# EAGLE board 210042174_Hasin_Mahtab_Task_02 (EAGLE 9.7.0)

Size 176.99 x 107.53 mm. Coordinates in mm from the lower left corner, seen from the top.
Outline: 0,0 176.99,0 176.99,107.53 0,107.53 0,0
Copper layers (1*16): Top 0.035mm / dielectric 1.5mm / Bottom 0.035mm
Design rules "default": minimum track width 6mil, minimum drill 0.35mm, track to track 6mil, track to pad 6mil, pad to pad 6mil, via to via 6mil, smd to smd 6mil, copper to edge 40mil, drill to drill 6mil, minimum pad ring 10mil, minimum via ring 8mil, stop-mask expansion 4mil, vias tented up to drill 0mil, thermal gap 10mil

## Footprints (pad centres in the part's own frame; a part is rotated, then mirrored left to right if it is on the bottom)
BATTERY-GENERIC = drill 1.118 pad 3.15 octagon: + 2.54,0; - -2.54,0
1X06 = drill 1.016 long: 1 -6.35,0; 2 -3.81,0; 3 -1.27,0; 4 1.27,0; 5 3.81,0; 6 6.35,0
HA-06-SM065 = drill 1 pad 1.676: 1 -2.54,-2.54; 2 0,2.54; 3 2.54,-2.54
DIP762W53P254L1969H508Q16B = drill 0.743 pad 1.343: 1 -3.81,8.89; 2 -3.81,6.35; 3 -3.81,3.81; 4 -3.81,1.27; 5 -3.81,-1.27; 6 -3.81,-3.81; 7 -3.81,-6.35; 8 -3.81,-8.89; 9 3.81,-8.89; 10 3.81,-6.35; 11 3.81,-3.81; 12 3.81,-1.27; 13 3.81,1.27; 14 3.81,3.81; 15 3.81,6.35; 16 3.81,8.89
ARDUINO-UNO-R3-SHIELD = drill 1.016 pad 1.88: 3.3V 24.13,-2.54; 5V 24.13,0; A0 24.13,12.7; A1 24.13,15.24; A2 24.13,17.78; A3 24.13,20.32; A4 24.13,22.86; A5 24.13,25.4; AREF -24.13,-13.97; D2 -24.13,20.32; D3 -24.13,17.78; D4 -24.13,15.24; D5 -24.13,12.7; D6 -24.13,10.16; D7 -24.13,7.62; D8 -24.13,3.81; D9 -24.13,1.27; D10 -24.13,-1.27; D11 -24.13,-3.81; D12 -24.13,-6.35; D13 -24.13,-8.89; GND@0 24.13,2.54; GND@1 24.13,5.08; GND@2 -24.13,-11.43; IOREF 24.13,-7.62; NC 24.13,-10.16; RES 24.13,-5.08; RX -24.13,25.4; SCL -24.13,-19.05; SDA -24.13,-16.51; TX -24.13,22.86; VIN 24.13,7.62

## Placement (x,y rotation side)
BATBATTERY  9V  [BATTERY-GENERIC]  133.34,11.1 180 top
M1  PINHD-1X06_1X06M  [1X06]  121.23,101.26 0 top
RPOT1  250k  [HA-06-SM065]  169.94,7.05 180 top
U1  L293E  [DIP762W53P254L1969H508Q16B]  124.16,50.82 90 top
UUNO  ARDUINO-UNO-R3-SHIELD  [ARDUINO-UNO-R3-SHIELD]  47.88,51.36 270 top

## Library data of the parts
BATBATTERY M1 RPOT1 U1 UUNO = Tinkercad

## Nets
BATBATTERY+: BATBATTERY.+ U1.8
BATBATTERY-: BATBATTERY.- M1.5 RPOT1.1 U1.4 U1.5 U1.12 U1.13 UUNO.GND@0 UUNO.GND@1 UUNO.GND@2
M1_4: M1.4 UUNO.D3
U1_1Y: M1.1 U1.3
U1_2Y: M1.6 U1.6
UUNO_5V: M1.3 RPOT1.3 U1.16 UUNO.5V
UUNO_A0: RPOT1.2 UUNO.A0
UUNO_D10: U1.1 U1.9 UUNO.D10
UUNO_D12: U1.2 U1.7 UUNO.D12

## Tracks (layer width: path | path; a pad name or v marks a point on that pad's centre or on a via)
BATBATTERY+  (1 unrouted)
BATBATTERY-  (9 unrouted)
M1_4  (1 unrouted)
U1_1Y  (1 unrouted)
U1_2Y  (1 unrouted)
UUNO_5V  (3 unrouted)
UUNO_A0  (1 unrouted)
UUNO_D10  (2 unrouted)
UUNO_D12  (2 unrouted)